# EAGLE board rev11 (EAGLE 7.4.0)
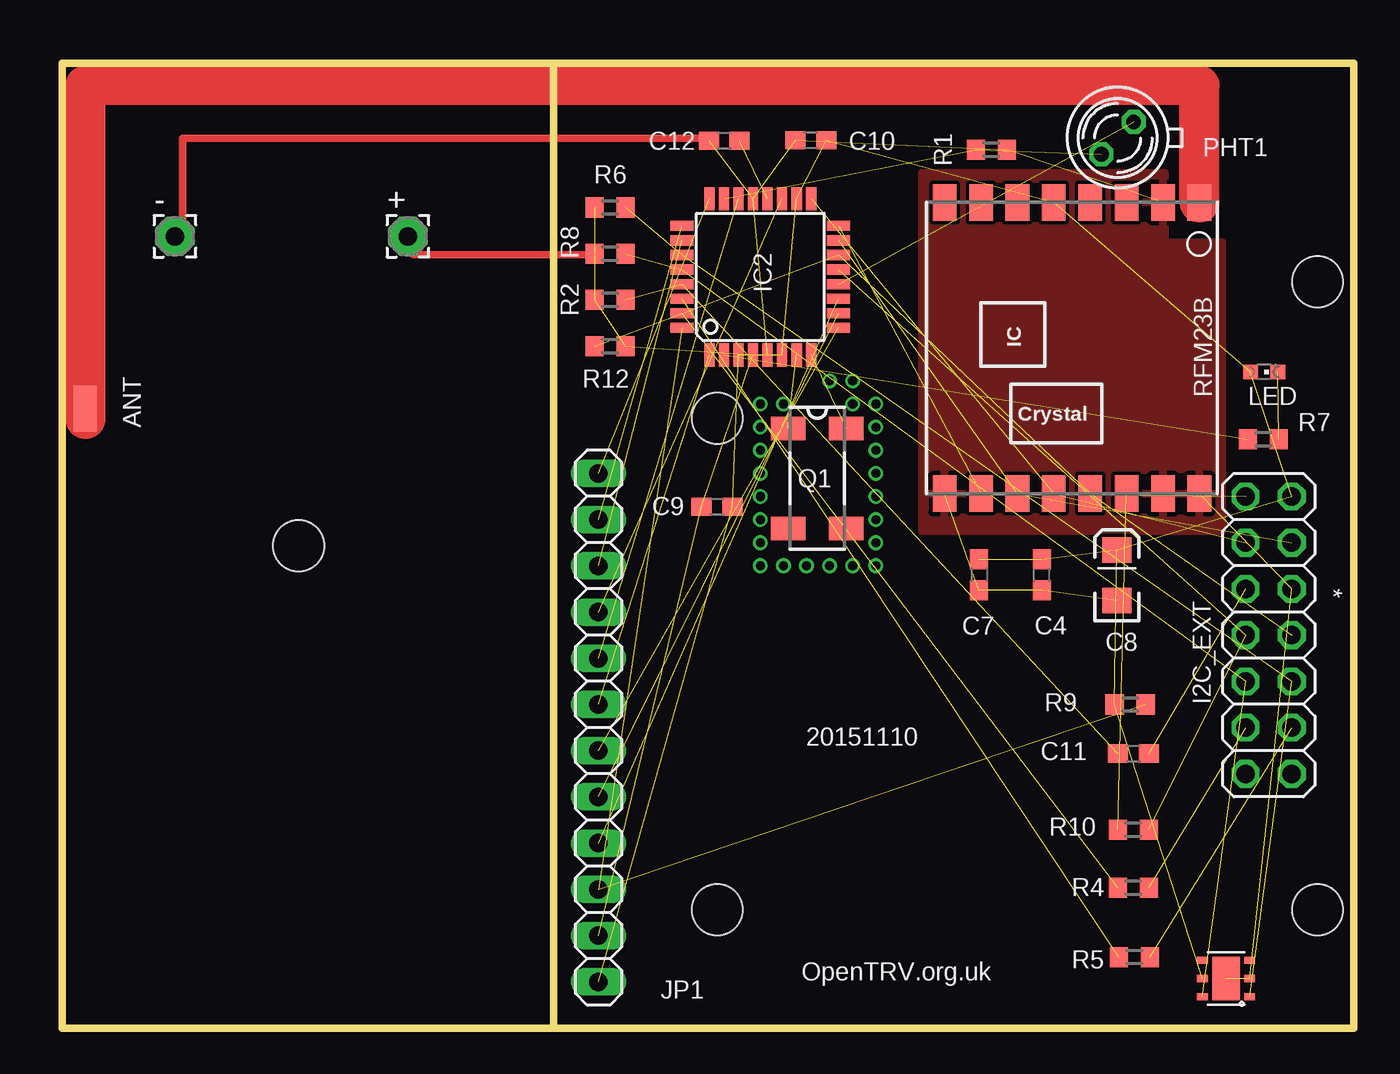
[diagram p0: board, top side]
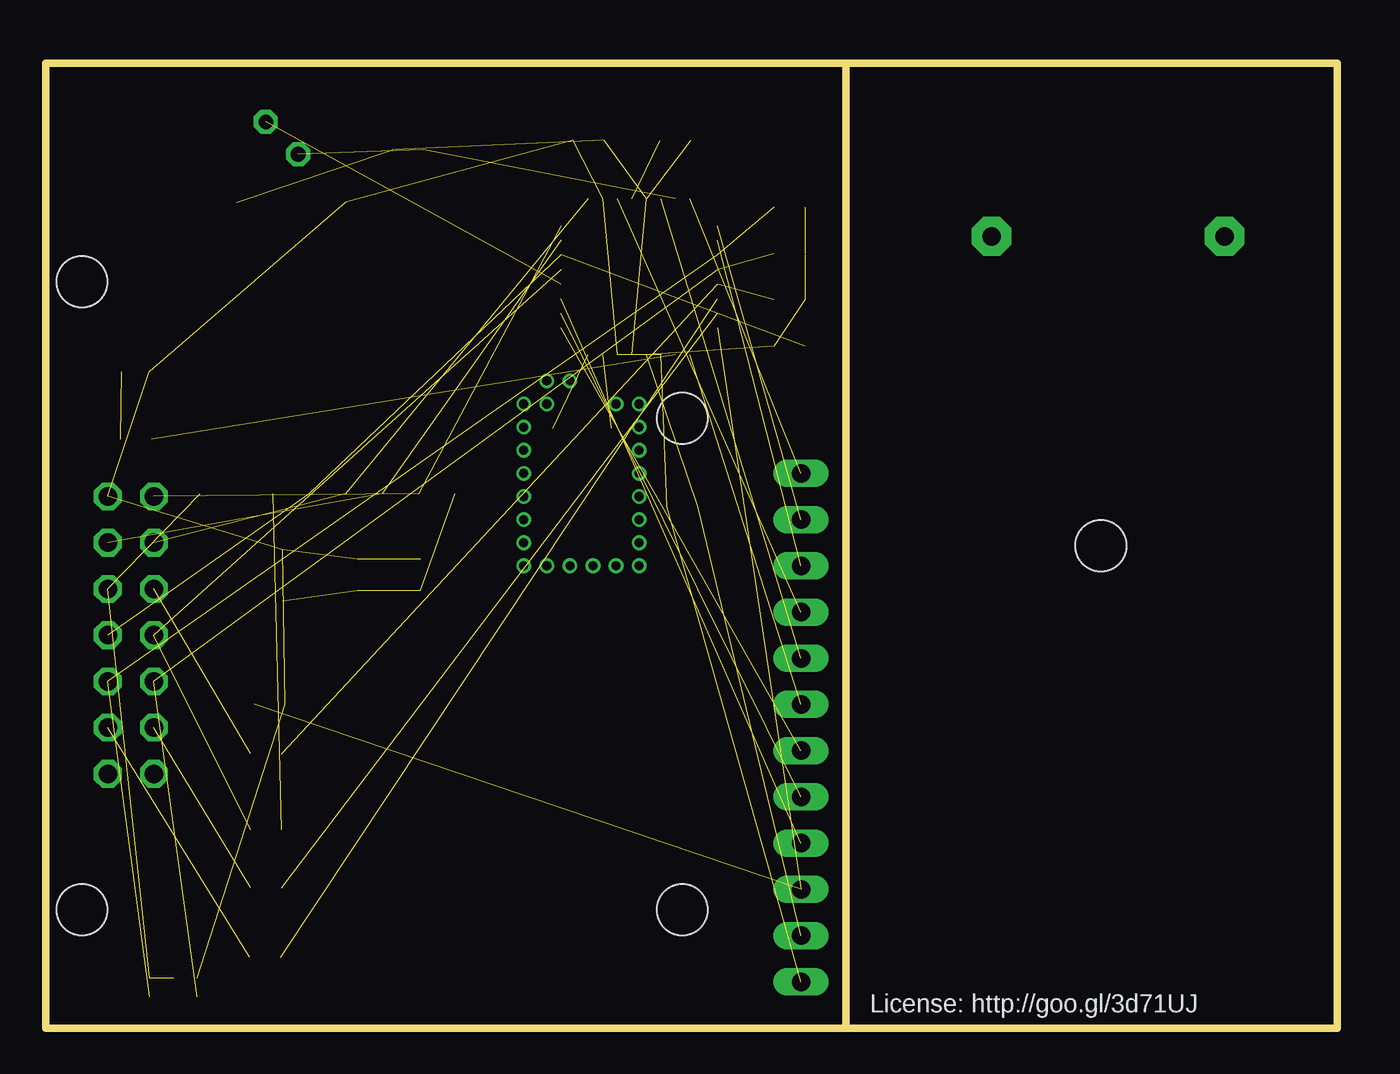
[diagram p1: board, bottom side, seen from below]

Size 71 x 53 mm. Coordinates in mm from the lower left corner, seen from the top.
Outline: 27,0 0,0 0,53 27,53
Outline: 27,0 71,0 71,53 27,53
Outline: 27,53 27,0
Copper layers (1*16): Top 0.035mm / dielectric 1.5mm / Bottom 0.035mm
Design rules "PMServicesStd *": minimum track width 8mil, minimum drill 0.5mm, track to track 8mil, track to pad 8mil, pad to pad 8mil, via to via 8mil, smd to smd 0mil, copper to edge 10mil, drill to drill 10mil, minimum pad ring 10mil, minimum via ring 6mil, stop-mask expansion 2mil, vias tented up to drill 100mil, thermal gap 10mil
Net classes: 0 default: width 0.203 mm; 1 supply: width 0.5 mm, clearance 0.203 mm; 2 ant: width 2.184 mm
Holes 2.8 mm at 13,26.5 36,6.5 69,41 69,6.5 36,33.5

## Footprints (pad centres in the part's own frame; a part is rotated, then mirrored left to right if it is on the bottom)
2,15/1,0 = drill 1.016 pad 2.159 octagon: 1 0,0
SMD1,27-2,54 = smd 1.27 x 2.54: 1 0,0
C0603 = smd 1.1 x 1: 1 -0.85,0; 2 0.85,0
EIA3216 = smd 1.4 x 1.6: A 1.4,0; C -1.4,0
2X07 = drill 1.016 octagon: 1 -7.62,-1.27; 2 -7.62,1.27; 3 -5.08,-1.27; 4 -5.08,1.27; 5 -2.54,-1.27; 6 -2.54,1.27; 7 0,-1.27; 8 0,1.27; 9 2.54,-1.27; 10 2.54,1.27; 11 5.08,-1.27; 12 5.08,1.27; 13 7.62,-1.27; 14 7.62,1.27
TQFP32-08 = smd 1.27 x 0.559: 1 -4.293,2.8; 2 -4.293,2; 3 -4.293,1.2; 4 -4.293,0.4; 5 -4.293,-0.4; 6 -4.293,-1.2; 7 -4.293,-2; 8 -4.293,-2.8; 17 4.293,-2.8; 18 4.293,-2; 19 4.293,-1.2; 20 4.293,-0.4; 21 4.293,0.4; 22 4.293,1.2; 23 4.293,2; 24 4.293,2.8 | smd 0.559 x 1.27: 9 -2.8,-4.293; 10 -2,-4.293; 11 -1.2,-4.293; 12 -0.4,-4.293; 13 0.4,-4.293; 14 1.2,-4.293; 15 2,-4.293; 16 2.8,-4.293; 25 2.8,4.293; 26 2,4.293; 27 1.2,4.293; 28 0.4,4.293; 29 -0.4,4.293; 30 -1.2,4.293; 31 -2,4.293; 32 -2.8,4.293
1X12 = drill 1.016 long: 1 -13.97,0; 2 -11.43,0; 3 -8.89,0; 4 -6.35,0; 5 -3.81,0; 6 -1.27,0; 7 1.27,0; 8 3.81,0; 9 6.35,0; 10 8.89,0; 11 11.43,0; 12 13.97,0
CHIPLED_0603 = smd 0.8 x 0.8: A 0,-0.75; C 0,0.75
BPX65 = drill 0.813 octagon: A -0.889,-0.889; K 0.889,0.889
MC-306 = smd 1.3 x 1.9: 1 -2.75,-1.6; 2 2.75,-1.6; 3 2.75,1.6; 4 -2.75,1.6
R0603 = smd 1 x 1.1: 1 -0.85,0; 2 0.85,0
RFM23-XXX-S1 = smd 2 x 1.3: 1 -8,7; 2 -8,5; 3 -8,3; 4 -8,1; 5 -8,-1; 6 -8,-3; 7 -8,-5; 8 -8,-7; 9 8,-7; 10 8,-5; 11 8,-3; 12 8,-1; 13 8,1; 14 8,3; 15 8,5; 16 8,7
SHT21 = smd 0.4 x 0.6: 1 -1,-1.3; 2 0,-1.3; 3 1,-1.3; 4 1,1.3; 5 0,1.3; 6 -1,1.3 | smd 2.4 x 1.5: P$1 0,0

## Placement (x,y rotation side)
+  [2,15/1,0]  19,43.5 0 top
-  [2,15/1,0]  6.2,43.5 0 top
ANT  [SMD1,27-2,54]  1.27,34.02 0 top
C4  100pF  [C0603]  53.85,24.9 90 top
C7  100nF  [C0603]  50.39,24.91 270 top
C8  100uF  [EIA3216]  57.97,24.88 90 top
C9  100nF  [C0603]  35.99,28.64 0 top
C10  100nF  [C0603]  41.14,48.78 180 top
C11  100nF  [C0603]  58.88,15.08 0 top
C12  100nF  [C0603]  36.39,48.76 180 top
I2C_EXT  [2X07]  66.31,21.59 270 top
IC2  ATMEGA168-AU  [TQFP32-08]  38.37,41.27 90 top
JP1  [1X12]  29.48,16.51 270 top
LED  [CHIPLED_0603]  66.06,36.05 270 top
PHT1  BPX65  [BPX65]  58,48.9 180 top
Q1  32768Hz  [MC-306]  41.5,30.2 270 top
R1  100K  [R0603]  51.07,48.26 0 top
R2  4.7K  [R0603]  30.11,40.01 0 top
R4  4.7K  [R0603]  58.88,7.72 0 top
R5  4.7K  [R0603]  58.92,3.91 0 top
R6  4.7K  [R0603]  30.11,45.09 0 top
R7  470R  [R0603]  66.02,32.35 0 top
R8  4.7K  [R0603]  30.11,42.55 180 top
R9  4.7K  [R0603]  58.69,17.78 180 top
R10  1K  [R0603]  58.88,10.91 180 top
R12  4.7K  [R0603]  30.11,37.47 0 top
RFM23B  RFM23B  [RFM23-XXX-S1]  55.5,37.37 270 top
U$1  [OSHW_10X200_NOTEXT]  75.9,21.11 0 top  (outside the outline)
U$2  [TONNE]  81.42,4.86 0 top  (outside the outline)
U$4  SHT21  [SHT21]  63.96,2.73 90 top

## Library data of the parts
+ - ANT = wirepad
C4 C7 C9-C12 R1 R2 R4-R10 R12 = resistor
C8 = SparkFun-Passives
I2C_EXT JP1 = pinhead
IC2 = Arduino-AVR
LED = adafruit
PHT1 = opto-trans-siemens; MPN: BPX65.; OC_FARNELL: 327451; OC_NEWARK: 06WX2764
Q1 = crystal; MPN: MC-306 60.0KHZ 100PPM ,12.5PF; OC_FARNELL: 1278040; OC_NEWARK: 31M5576
RFM23B = SparkFun-RF
U$1 = ohw-logo
U$2 = logo
U$4 = SHT21

## Nets
A1: IC2.24 JP1.1
A2: IC2.25 JP1.2
A3: IC2.26 JP1.3
A6: IC2.19 JP1.4
A7: IC2.22 JP1.5
D2: IC2.32 JP1.10 R9.1
D3: IC2.1 JP1.6
D5: IC2.9 JP1.7
D6: IC2.10 JP1.8
D7: IC2.11 JP1.9
GND [supply]: -.1 C4.1 C7.2 C8.C C9.2 C10.2 C12.2 I2C_EXT.6 IC2.3 IC2.5 IC2.21 JP1.12 R1.2 RFM23B.2 RFM23B.9 RFM23B.15 RFM23B.16 U$4.2 U$4.P$1
IO_POWER_UP [supply]: IC2.12 PHT1.A
LDR: IC2.23 PHT1.K R1.1
LED_HEATCALL_L: IC2.2 R7.1
N$1: C11.2 I2C_EXT.5
N$3: I2C_EXT.12 R5.2
N$4: I2C_EXT.11 R4.2
N$6 [supply]: C12.1 IC2.20
N$7: R10.2 RFM23B.14
N$13: LED.C R7.2
N$31 [ant]: ANT.1 RFM23B.1
RESET: C11.1 IC2.29 R2.2
RFM_IRQ: I2C_EXT.7 IC2.13 R10.1
RX: IC2.31 R4.1
SCL: I2C_EXT.9 IC2.28 R8.1 U$4.6
SDA: I2C_EXT.10 IC2.27 R6.2 U$4.1
SPI_MISO: I2C_EXT.1 IC2.16 RFM23B.10
SPI_MOSI: I2C_EXT.4 IC2.15 RFM23B.11
SPI_NSS: I2C_EXT.8 IC2.14 R12.1 RFM23B.13
SPI_SCK: I2C_EXT.3 IC2.17 RFM23B.12
TX: IC2.30 R5.1
VCC [supply]: +.1 C4.2 C7.1 C8.A C9.1 C10.1 I2C_EXT.2 IC2.4 IC2.6 IC2.18 JP1.11 LED.A R2.1 R6.1 R8.2 R9.2 R12.2 RFM23B.5 U$4.5
XTAL1: IC2.8 Q1.4
XTAL2: IC2.7 Q1.1

## Tracks (layer width: path | path; a pad name or v marks a point on that pad's centre or on a via)
A1  (1 unrouted)
A2  (1 unrouted)
A3  (1 unrouted)
A6  (1 unrouted)
A7  (1 unrouted)
D2  (2 unrouted)
D3  (1 unrouted)
D5  (1 unrouted)
D6  (1 unrouted)
D7  (1 unrouted)
GND  (14 unrouted)
  Top 0.406: -.1 6.62,43.5 6.62,48.9 35.54,48.9 C12.2
  pour Top: 47.26,27.3 47.26,46.99 60.59,46.99 60.59,43.18 63.77,43.18 63.77,27.3
IO_POWER_UP  (1 unrouted)
LDR  (2 unrouted)
LED_HEATCALL_L  (1 unrouted)
N$1  (1 unrouted)
N$3  (1 unrouted)
N$4  (1 unrouted)
N$6  (1 unrouted)
N$7  (1 unrouted)
N$11  (via drill 0.5)
  other vias: 39.64,25.4
N$12  (via drill 0.5)
  other vias: 40.91,25.4
N$13  (1 unrouted)
N$14  (via drill 0.5)
  other vias: 42.18,25.4
N$15  (via drill 0.5)
  other vias: 43.45,25.4
N$16  (via drill 0.5)
  other vias: 44.72,25.4
N$17  (via drill 0.5)
  other vias: 44.72,26.67
N$19  (via drill 0.5)
  other vias: 44.72,27.94
N$20  (via drill 0.5)
  other vias: 44.72,29.21
N$21  (via drill 0.5)
  other vias: 44.72,30.48
N$22  (via drill 0.5)
  other vias: 44.72,31.75
N$24  (via drill 0.5)
  other vias: 44.72,33.02
N$25  (via drill 0.5)
  other vias: 44.72,34.29
N$26  (via drill 0.5)
  other vias: 43.45,34.29
N$28  (via drill 0.5)
  other vias: 43.45,35.56
N$30  (via drill 0.5)
  other vias: 42.18,35.56
N$31
  Top 2.184: RFM23B.1 62.5,51.8 1.27,51.8 ANT.1 1.27,33.47
N$32  (via drill 0.5)
  other vias: 38.37,33.02
N$33  (via drill 0.5)
  other vias: 38.37,31.75
N$34  (via drill 0.5)
  other vias: 38.37,30.48
N$35  (via drill 0.5)
  other vias: 38.37,29.21
N$36  (via drill 0.5)
  other vias: 38.37,27.94
N$37  (via drill 0.5)
  other vias: 38.37,26.67
N$38  (via drill 0.5)
  other vias: 38.37,25.4
N$39  (via drill 0.5)
  other vias: 39.64,34.29
N$40  (via drill 0.5)
  other vias: 38.37,34.29
RESET  (2 unrouted)
RFM_IRQ  (2 unrouted)
RX  (1 unrouted)
SCL  (3 unrouted)
SDA  (3 unrouted)
SPI_MISO  (2 unrouted)
SPI_MOSI  (2 unrouted)
SPI_NSS  (3 unrouted)
SPI_SCK  (2 unrouted)
TX  (1 unrouted)
VCC  (17 unrouted)
  Top 0.406: +.1 19.32,43.18 19.32,42.5 29.27,42.5 R8.2
XTAL1  (1 unrouted)
XTAL2  (1 unrouted)

## Text on the board
bPlace: License: http://goo.gl/3d71UJ
tNames: * | 20151110 | OpenTRV.org.uk